# Altium PCB Zenith Solar Panel.PcbDoc (part 2 of 2)
Units mm, origin at the board's own origin, x right, y up, seen from the top; angles counter-clockwise.
Board outline 327.5 x 87 mm, 2 copper layers (Top Layer, Bottom Layer), stack 1.58 mm thick; 58 components, 37 nets, 208 pads, 1477 vias.
Unrouted connection lines stored in the file: 41.
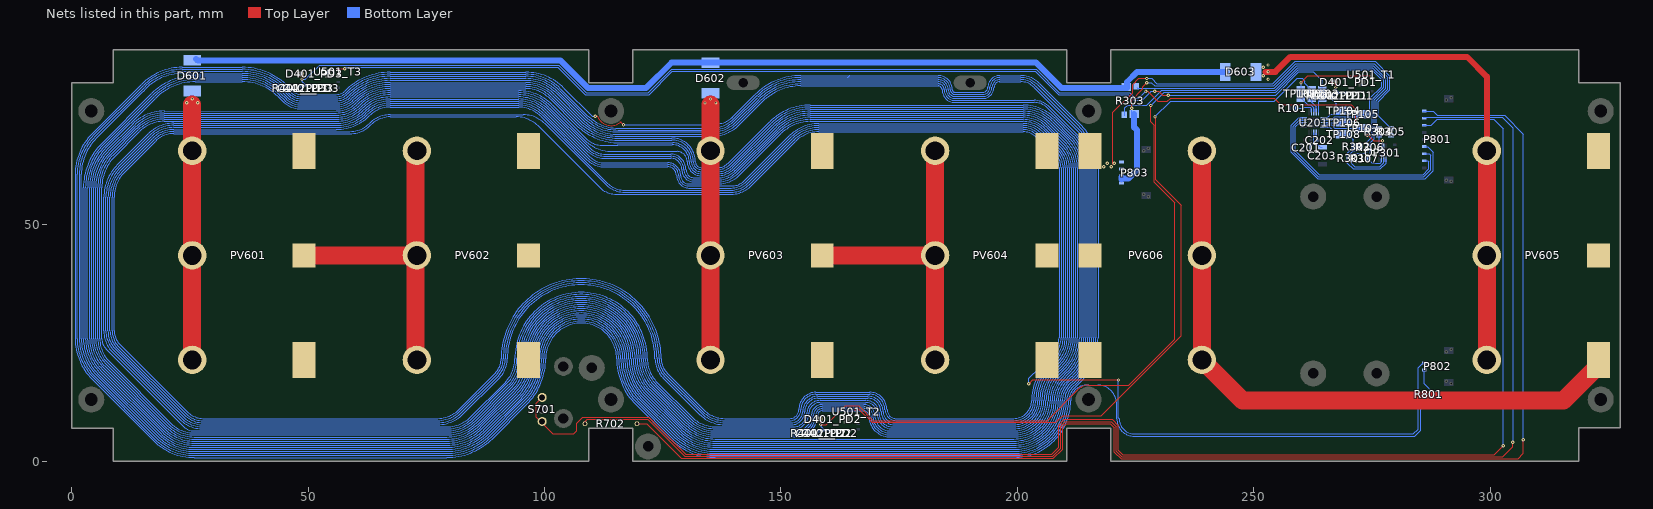
[diagram p2: the nets of this part, all layers, seen from the top]

## Via types
v1: diameter 0.711, hole 0.3, Top Layer to Bottom Layer, tented both sides, 858 vias
v2: diameter 0.8, hole 0.5, Top Layer to Bottom Layer, 617 vias
v3: diameter 0.711, hole 0.3, Top Layer to Bottom Layer, 2 vias

## Nets (pads, with @x,y where several pads share a name; then routed paths per layer and width w, separated by ;. In a path a pad name is that pad's centre, name@x,y a point inside that pad or via, vN(x,y) a via of type N, cw(c..) or ccw(c..) an arc to the next point about the centre after c; other vN are vias at no path point) (continued)
MAG1: P802.1 R801.2 | length 11601.4
  Top Layer w0.254: v1(110.7,72.908) 111.026,72.908 cw(c111.028,72.654) 111.26,72.757 ccw(c114.05,74) 115.92,71.584 cw(c116.075,71.384) 116.256,71.563 v1(116.7,71.118) ; v3(202.4,16.343) 202.46,16.343 203.262,17.145 v3(221.374,17.145)
  Bottom Layer w0.254: 0.75,25.898 0.75,60.602 ; 0.753,25.898 ccw(c12.833,25.898) 4.292,17.357 17.357,4.292 ccw(c25.898,12.833) 25.898,0.753 ; 0.753,60.602 cw(c12.917,60.602) 4.316,69.202 14.801,79.687 cw(c23.398,71.089) 23.398,83.248 ; 1.615,60.613 1.615,60.602 1.615,25.91 ccw(c12.957,25.91) 4.937,17.89 17.905,4.921 ccw(c25.898,12.914) 25.898,1.61 79.352,1.61 ccw(c79.352,14.395) 88.392,5.355 ; 1.618,60.602 cw(c12.913,60.602) 4.926,68.588 15.412,79.074 cw(c23.398,71.087) 23.398,82.382 36.102,82.382 cw(c36.102,69.605) 45.136,78.64 ; 2.048,60.61 2.048,60.602 2.048,25.907 ccw(c12.939,25.907) 5.238,18.206 18.213,5.231 ccw(c25.899,12.917) 25.899,2.047 79.352,2.047 ccw(c79.352,14.398) 88.085,5.665 ; 2.052,60.602 cw(c12.906,60.602) 5.231,68.276 14.895,77.941 14.895,77.942 15.308,78.355 15.309,78.355 15.717,78.763 cw(c23.4,71.08) 23.4,81.945 36.102,81.945 cw(c36.102,69.602) 44.829,78.33 ; 2.92,57.843 2.92,25.898 ccw(c12.941,25.898) 5.855,18.813 18.826,5.841 ccw(c25.898,12.914) 25.898,2.912 79.352,2.912 ccw(c79.352,14.395) 87.471,6.275 ; 2.923,57.843 cw(c15.646,57.843) 6.649,66.84 ; 3.788,57.843 3.788,25.899 ccw(c12.935,25.899) 6.467,19.43 19.445,6.453 ccw(c25.898,12.907) 25.898,3.78 79.352,3.78 ccw(c79.352,14.395) 86.857,6.889 ; 3.791,57.843 cw(c15.646,57.843) 7.263,66.226 17.774,76.737 cw(c26.157,68.354) 26.157,80.209 36.102,80.209 cw(c36.102,69.602) 43.575,77.129 ; 4.222,57.84 4.222,25.895 ccw(c12.927,25.895) 6.772,19.74 19.751,6.76 ccw(c25.898,12.907) 25.898,4.214 ; 4.225,57.843 cw(c15.646,57.843) 7.57,65.919 12.885,71.233 12.951,71.299 ; 4.656,57.84 4.656,25.895 ccw(c12.927,25.895) 7.079,20.047 20.058,7.067 ccw(c25.898,12.907) 25.898,4.648 ; 4.662,57.846 cw(c15.649,57.846) 7.88,65.615 13.191,70.927 ; 5.09,57.843 5.09,25.899 ccw(c12.941,25.899) 7.39,20.347 20.361,7.376 ccw(c25.898,12.913) 25.898,5.082 79.35,5.082 ; 5.093,57.843 cw(c15.646,57.843) 8.184,65.305 13.498,70.62 ; 5.524,57.84 5.524,25.895 ccw(c12.933,25.895) 7.694,20.656 20.668,7.682 ccw(c25.898,12.913) 25.898,5.516 79.35,5.516 ; 5.53,57.866 cw(c15.649,57.866) 8.494,65.022 13.795,70.323 ; 5.961,57.843 cw(c15.646,57.843) 8.798,64.691 14.112,70.006 ; 5.966,57.843 5.966,25.899 ccw(c12.969,25.899) 8.017,20.947 20.98,7.984 ccw(c25.898,12.902) 25.898,5.947 ; 6.392,57.843 6.392,25.898 ccw(c9.515,25.898) 7.307,23.69 23.704,7.293 ccw(c25.898,9.487) 25.898,6.384 ; 6.395,57.843 cw(c15.646,57.843) 9.105,64.384 14.419,69.699 ; 6.652,66.837 17.16,77.345 cw(c26.157,68.349) 26.157,81.072 36.102,81.072 cw(c36.102,69.597) 44.216,77.711 45.256,76.671 ccw(c48.5,79.915) 48.5,75.327 56,75.327 ccw(c56,79.915) 59.244,76.671 ; 6.81,27.512 ccw(c13.222,27.514) 8.567,23.104 22.83,8.842 ccw(c27.716,13.728) 27.489,6.821 79.351,6.818 ; 6.81,27.514 6.81,55.75 cw(c16.561,55.75) 9.666,62.645 16.237,69.217 cw(c21.577,63.877) 21.577,71.429 ; 7.244,27.512 ccw(c13.222,27.514) 8.882,23.403 23.136,9.148 ccw(c27.716,13.728) 27.503,7.255 79.352,7.252 ccw(c79.352,14.395) 84.402,9.344 ; 7.244,27.514 7.244,55.75 cw(c16.561,55.75) 9.973,62.338 16.529,68.894 cw(c21.562,63.861) 21.562,70.979 56,70.979 56.006,70.979 ; 7.678,27.515 7.678,55.75 cw(c16.561,55.75) 10.28,62.031 16.836,68.588 cw(c21.562,63.861) 21.562,70.545 56,70.545 56.006,70.545 ; 7.678,27.513 ccw(c13.075,27.514) 9.157,23.803 23.55,9.409 ccw(c27.711,13.569) 27.517,7.689 77.376,7.686 ; 8.112,27.513 ccw(c13.074,27.514) 9.471,24.101 23.821,9.751 ccw(c27.764,13.694) 27.764,8.119 64.911,8.116 77.376,8.116 ; 8.112,27.515 8.112,55.75 cw(c16.561,55.75) 10.586,61.724 17.143,68.281 cw(c21.562,63.861) 21.562,70.111 55.994,70.111 56.006,70.111 ; 8.546,27.513 ccw(c13.074,27.514) 9.786,24.4 24.128,10.058 ccw(c27.764,13.694) 27.764,8.553 ; 8.546,27.515 8.546,55.75 cw(c16.561,55.75) 10.893,61.417 17.45,67.974 cw(c21.562,63.861) 21.562,69.677 58.854,69.677 ; 8.98,27.513 ccw(c12.727,27.514) 10.006,24.937 24.68,10.264 ccw(c27.764,13.348) 27.764,8.987 ; 8.98,27.515 8.98,55.75 cw(c16.561,55.75) 11.2,61.111 17.756,67.667 cw(c21.562,63.861) 21.562,69.243 58.854,69.243 ; 12.882,71.237 cw(c19.613,64.506) 19.613,74.025 ; 13.188,70.93 cw(c19.613,64.506) 19.613,73.591 ; 13.495,70.623 cw(c19.613,64.506) 19.613,73.157 56,73.157 ccw(c56,79.915) 60.78,75.138 ; 13.802,70.316 cw(c19.613,64.506) 19.613,72.723 56,72.723 ccw(c56,79.915) 61.087,74.831 ; 14.109,70.009 cw(c19.613,64.506) 19.613,72.289 56,72.289 ccw(c56,79.915) 61.394,74.524 cw(c67.359,68.558) 67.359,76.995 94.5,76.995 ; 14.416,69.702 cw(c19.613,64.506) 19.613,71.855 56,71.855 ; 19.613,73.591 56,73.591 ccw(c56,79.915) 60.473,75.445 ; 19.613,74.02 56,74.025 ccw(c56,79.915) 60.166,75.751 ; 21.591,71.418 56,71.421 ccw(c56,79.915) 62.008,73.911 ; 23.398,83.25 36.102,83.25 ; 25.898,0.75 79.352,0.75 ; 25.898,5.953 79.352,5.95 ccw(c79.352,14.395) 85.323,8.423 ; 25.898,6.387 79.352,6.384 ccw(c79.352,14.395) 85.016,8.73 ; 25.899,4.214 79.352,4.214 ccw(c79.352,14.395) 86.551,7.196 ; 25.899,4.648 79.352,4.648 ccw(c79.352,14.395) 86.244,7.503 ; 27.764,8.561 77.376,8.558 ccw(c77.376,15.267) 81.905,10.318 89.868,18.281 ccw(c86.498,21.652) 91.265,21.652 cw(c107.745,21.652) 124.225,21.652 ccw(c128.992,21.652) 125.621,18.281 ; 27.764,8.995 77.376,8.992 ccw(c77.376,15.267) 81.605,10.632 89.561,18.588 ccw(c86.498,21.652) 90.831,21.652 cw(c107.745,21.652) 124.659,21.652 ccw(c128.992,21.652) 125.928,18.588 ; 36.102,83.248 cw(c36.102,69.603) 45.75,79.252 ; 43.602,77.097 44.642,76.057 ccw(c48.5,79.915) 48.5,74.459 56,74.459 ccw(c56,79.915) 59.859,76.058 ; 44.829,78.325 45.87,77.285 ccw(c48.5,79.915) 48.5,76.195 56,76.195 ccw(c56,79.915) 58.63,77.285 ; 45.136,78.635 46.176,77.594 ccw(c48.5,79.918) 48.5,76.632 56,76.632 ccw(c56,79.918) 58.324,77.594 cw(c67.358,68.56) 67.358,81.337 96.061,81.337 ; 45.563,76.978 ccw(c48.5,79.915) 48.5,75.761 56,75.761 ccw(c56,79.915) 58.938,76.977 ; 45.563,76.983 44.522,78.023 ccw(c36.102,69.602) 36.102,81.511 26.157,81.511 ccw(c26.157,68.354) 16.854,77.657 6.343,67.146 ccw(c15.646,57.843) 2.489,57.843 2.489,25.898 ccw(c12.951,25.898) 5.553,18.5 18.519,5.535 ccw(c25.898,12.914) 25.898,2.478 79.351,2.478 ccw(c79.351,14.395) 87.778,5.968 ; 45.749,79.251 46.791,78.209 ; 46.79,78.208 ccw(c48.5,79.918) 48.5,77.5 56,77.5 ccw(c56,79.919) 57.71,78.209 cw(c67.358,68.561) 67.358,82.206 96.061,82.206 cw(c96.061,70.829) 104.105,78.875 110.072,72.908 v1(110.7,72.908) ; 55.994,70.127 ccw(c55.994,79.923) 62.923,72.998 ; 56,70.553 ccw(c56,79.915) 62.622,73.297 cw(c67.36,68.558) 67.36,75.259 ; 56,70.987 ccw(c56,79.915) 62.315,73.604 cw(c67.359,68.558) 67.359,75.693 ; 56,71.855 ccw(c56,79.915) 61.701,74.217 ; 56,77.066 48.5,77.066 cw(c48.5,79.918) 46.483,77.901 45.443,78.942 45.443,78.947 ccw(c36.102,69.605) 36.102,82.816 23.4,82.816 ccw(c23.4,71.083) 15.104,79.38 4.619,68.895 ccw(c12.913,60.602) 1.184,60.602 1.184,25.898 ccw(c12.934,25.898) 4.625,17.59 17.598,4.617 ccw(c25.898,12.917) 25.898,1.179 79.351,1.179 ccw(c79.351,14.398) 88.698,5.051 88.703,5.059 95.951,12.307 ccw(c86.609,21.648) 99.82,21.586 99.82,21.648 99.812,21.648 cw(c107.748,21.648) 115.684,21.648 ccw(c128.895,21.648) 119.557,12.303 126.807,5.053 ccw(c136.148,14.395) 136.124,1.184 136.148,1.184 ; 56,77.067 ccw(c56,79.919) 58.019,77.905 cw(c67.358,68.561) 67.358,81.772 96.063,81.772 cw(c96.062,71.406) 103.368,78.759 108.97,73.157 ccw(c115.626,79.813) 115.626,70.4 135.269,70.4 ccw(c135.269,77.039) 139.964,72.345 144.81,77.19 144.811,77.192 ; 58.63,77.293 cw(c67.358,68.565) 67.358,80.908 96.056,80.908 ; 58.854,69.241 ccw(c58.854,75.48) 63.267,71.069 ; 58.854,69.675 ccw(c58.854,75.48) 62.96,71.376 cw(c67.391,66.944) 67.391,73.211 95.501,73.211 cw(c95.501,66.566) 100.177,71.287 ; 58.937,76.987 cw(c67.358,68.566) 67.358,80.475 96.061,80.475 96.101,80.475 ; 59.244,76.675 cw(c67.358,68.561) 67.358,80.036 96.072,80.036 cw(c96.064,71.508) 102.094,77.538 107.675,71.957 ccw(c115.539,79.821) 115.539,68.7 133.926,68.7 cw(c135.1,65.611) 136.114,68.756 ccw(c136.192,68.998) 136.217,68.745 ccw(c135.354,76.956) 141.192,71.118 146.022,75.949 146.034,75.966 146.05,75.982 cw(c154.148,67.852) 154.148,79.327 154.148,79.33 183.25,79.33 cw(c183.25,78.5) 184.08,78.5 ccw(c186.75,78.5) 186.75,75.83 203.547,75.83 203.547,75.827 cw(c203.546,71.743) 206.434,74.631 211.943,69.122 cw(c204.875,62.055) 214.87,62.055 214.873,26.052 cw(c203.398,26.052) 211.546,17.971 211.512,17.938 211.505,17.938 210.283,16.717 210.279,16.713 210.287,16.713 ccw(c214.25,12.75) 208.646,12.748 cw(c199.25,12.75) 199.25,3.354 136.148,3.354 cw(c136.148,14.395) 128.341,6.588 121.088,13.841 cw(c128.895,21.648) 117.854,21.648 117.851,21.648 ccw(c107.745,21.648) 97.639,21.731 97.639,21.648 97.653,21.648 97.653,21.567 cw(c97.399,21.566) 97.653,21.563 cw(c86.612,21.648) 94.419,13.841 87.172,6.594 87.164,6.582 87.146,6.564 cw(c79.352,14.395) 79.352,3.346 25.898,3.346 cw(c25.898,12.906) 19.138,6.146 6.16,19.124 cw(c12.934,25.899) 3.354,25.899 3.354,57.843 3.357,57.843 cw(c15.646,57.843) 6.956,66.533 17.467,77.044 cw(c26.157,68.354) 26.154,80.643 36.102,80.643 cw(c36.102,69.602) 43.881,77.437 43.909,77.404 44.949,76.364 ccw(c48.5,79.915) 48.5,74.893 56,74.893 ccw(c56,79.915) 59.552,76.365 cw(c67.359,68.558) 67.359,79.599 96.103,79.599 96.067,79.601 96.138,79.601 cw(c96.139,79.347) 96.143,79.601 cw(c96.061,71.501) 101.789,77.229 107.376,71.643 ccw(c115.446,79.713) 115.446,68.3 126.933,68.3 cw(c126.933,63.333) 127.938,68.197 cw(c126.933,63.333) 131.9,63.333 ccw(c133.16,63.333) 133.16,62.073 136.607,62.072 ccw(c136.607,65.256) 138.859,63.005 147.625,71.732 cw(c156.181,63.176) 156.181,75.276 159.477,75.276 201.196,75.276 cw(c201.196,65.667) 207.99,72.461 211.636,68.816 cw(c204.875,62.055) 214.436,62.055 ; 59.858,76.061 cw(c67.358,68.561) 67.358,79.168 96.072,79.168 cw(c96.064,71.52) 101.472,76.928 107.053,71.347 ccw(c115.46,79.754) 115.46,67.865 126.937,67.865 cw(c126.937,63.336) 131.466,63.336 ccw(c133.16,63.336) 133.16,61.642 ; 60.164,75.757 cw(c67.357,68.564) 67.357,78.737 96.061,78.737 ; 60.472,75.447 cw(c67.358,68.561) 67.358,78.3 94.5,78.3 cw(c94.5,68.195) 101.611,75.374 108.808,68.178 ; 60.783,75.137 cw(c67.362,68.557) 67.358,77.862 94.5,77.862 ; 61.086,74.83 cw(c67.358,68.556) 67.358,77.427 94.5,77.427 ; 61.7,74.217 cw(c67.358,68.557) 67.358,76.56 94.5,76.56 ; 62.007,73.91 cw(c67.358,68.557) 67.358,76.126 94.5,76.126 ; 62.928,72.989 cw(c67.358,68.557) 67.358,74.824 ; 63.267,71.069 cw(c67.391,66.944) 67.391,72.777 94,72.777 cw(c94,66.132) 98.676,70.853 ; 67.358,74.823 94.499,74.823 ; 67.36,75.258 94.5,75.258 ; 67.359,75.692 94.5,75.692 ; 77.376,7.69 ccw(c77.376,15.267) 82.505,9.691 90.482,17.667 ccw(c86.498,21.652) 92.133,21.652 cw(c107.745,21.652) 123.357,21.652 ; 77.376,8.124 ccw(c77.376,15.267) 82.205,10.004 90.175,17.974 ccw(c86.498,21.652) 91.699,21.652 cw(c107.745,21.652) 123.791,21.652 ccw(c128.992,21.652) 125.314,17.974 ; 79.351,6.806 ccw(c79.351,14.383) 84.709,9.025 ; 79.352,0.753 ccw(c79.352,14.407) 89.006,4.752 96.253,12 ccw(c86.605,21.648) 100.25,21.648 cw(c107.752,21.648) 115.253,21.648 ccw(c128.898,21.648) 119.25,12 126.5,4.75 ccw(c136.148,14.398) 136.148,0.753 ; 79.352,5.082 ccw(c79.352,14.395) 85.937,7.81 ; 79.352,5.516 ccw(c79.352,14.395) 85.63,8.117 ; 84.403,9.356 91.65,16.603 ccw(c86.605,21.648) 93.74,21.648 ; 84.71,9.049 91.957,16.296 ccw(c86.605,21.648) 94.174,21.648 ; 85.024,8.741 92.272,15.988 ccw(c86.613,21.647) 94.616,21.647 ; 85.323,8.435 92.571,15.683 ccw(c86.605,21.648) 95.042,21.648 ; 85.63,8.128 92.878,15.376 ccw(c86.605,21.648) 95.476,21.648 ; 85.937,7.821 93.185,15.069 ccw(c86.605,21.648) 95.91,21.648 ; 86.244,7.514 93.492,14.762 ccw(c86.605,21.648) 96.344,21.648 ; 86.551,7.207 93.798,14.455 ccw(c86.605,21.648) 96.778,21.648 ; 86.865,6.901 94.112,14.148 ccw(c86.612,21.648) 97.219,21.648 ; 87.472,6.287 94.719,13.534 ccw(c86.605,21.648) 98.08,21.648 ; 87.778,5.98 95.026,13.228 ccw(c86.605,21.648) 98.514,21.648 ; 88.085,5.673 95.333,12.921 ccw(c86.605,21.648) 98.948,21.648 ; 88.392,5.366 95.64,12.614 ccw(c86.605,21.648) 99.382,21.648 ; 93.733,21.652 cw(c107.745,21.652) 121.757,21.652 ; 94.167,21.652 cw(c107.745,21.652) 121.204,23.442 cw(c107.745,21.652) 121.323,21.652 ccw(c128.892,21.652) 123.539,16.3 ; 94.5,74.828 cw(c94.5,68.195) 99.168,72.908 113.278,58.797 ccw(c116.912,62.43) 116.912,57.291 ; 94.5,75.262 cw(c94.5,68.195) 99.473,73.216 108.98,63.709 ccw(c112.613,67.343) 112.613,62.204 126.066,62.204 cw(c126.066,60.356) 127.914,60.356 ccw(c130.538,60.356) 130.538,57.732 ; 94.5,75.696 cw(c94.5,68.195) 99.779,73.524 109.286,64.016 ccw(c112.613,67.343) 112.613,62.638 126.066,62.638 cw(c126.066,60.356) 128.348,60.356 ccw(c130.538,60.356) 130.538,58.166 139.494,58.166 ; 94.5,76.134 cw(c94.5,68.199) 100.084,73.837 ; 94.5,76.564 cw(c94.5,68.195) 100.39,74.141 108.827,65.703 ; 94.5,76.998 cw(c94.5,68.195) 100.692,74.452 cw(c94.5,68.195) 100.694,74.45 109.134,66.01 ; 94.5,77.432 cw(c94.5,68.195) 100.999,74.759 109.441,66.317 ; 94.5,77.866 cw(c94.5,68.195) 101.306,75.066 108.507,67.865 ; 94.601,21.65 cw(c107.745,21.65) 120.889,21.65 ccw(c128.892,21.65) 123.233,15.991 ; 95.035,21.648 cw(c107.745,21.648) 120.455,21.648 ; 95.469,21.648 cw(c107.745,21.648) 120.021,21.648 ; 95.906,21.648 cw(c107.748,21.648) 119.59,21.648 ; 96.061,78.734 cw(c96.061,71.501) 101.176,76.615 106.754,71.037 ccw(c115.776,80.058) 115.776,67.3 127.068,67.3 cw(c127.068,63.336) 131.032,63.336 ccw(c133.16,63.336) 133.16,61.208 ; 96.061,80.47 cw(c96.061,71.458) 102.433,77.83 108.012,72.252 ccw(c115.621,79.861) 115.621,69.1 135.272,69.1 ccw(c135.272,77.038) 140.885,71.425 145.716,76.256 cw(c154.136,67.835) 154.136,79.744 ; 96.061,80.904 cw(c96.061,71.404) 102.778,78.122 108.357,72.543 ccw(c115.462,79.647) 115.462,69.6 135.432,69.6 ccw(c135.432,76.878) 140.578,71.732 145.405,76.559 ; 96.061,81.338 cw(c96.061,71.398) 103.09,78.426 108.669,72.848 ccw(c115.544,79.723) 115.544,70 135.35,70 ccw(c135.35,76.959) 140.271,72.038 145.106,76.873 ; 96.34,21.648 cw(c107.748,21.648) 119.156,21.648 ; 96.774,21.648 cw(c107.748,21.648) 118.722,21.648 ccw(c128.895,21.648) 121.702,14.455 ; 97.205,21.648 cw(c107.745,21.648) 118.285,21.648 ; 98.073,21.648 cw(c107.745,21.648) 117.417,21.648 ; 98.507,21.648 cw(c107.745,21.648) 116.983,21.648 ; 98.672,70.866 98.681,70.858 111.76,57.778 ; 98.944,21.648 cw(c107.748,21.648) 116.552,21.648 ; 99.378,21.648 cw(c107.748,21.648) 116.118,21.648 ccw(c128.895,21.648) 119.86,12.614 ; 100.084,73.833 109.593,64.323 ccw(c112.613,67.343) 112.613,63.072 126.066,63.072 cw(c126.066,60.356) 128.782,60.356 ccw(c130.538,60.356) 130.538,58.6 136.607,58.6 ccw(c136.607,65.256) 141.292,60.529 150.08,69.277 ; 100.173,71.3 100.182,71.292 113.2,58.273 ccw(c116.912,62.43) 116.912,56.857 ; 108.509,67.867 ccw(c114.314,73.672) 114.314,65.462 128.035,65.462 cw(c128.035,63.333) 130.164,63.333 ccw(c133.16,63.333) 133.138,60.337 ; 108.803,68.173 ccw(c112.119,71.488) 112.119,66.8 115.444,66.8 115.516,66.871 127.048,66.871 ; 108.829,65.705 ccw(c112.897,69.773) 112.897,64.02 126.672,64.02 cw(c126.672,61.658) 129.034,61.658 ccw(c131.658,61.658) 131.658,59.034 ; 109.136,66.012 ccw(c112.897,69.773) 112.897,64.454 126.672,64.454 cw(c126.672,61.658) 129.468,61.658 ccw(c131.658,61.658) 131.658,59.468 136.607,59.468 ccw(c136.607,65.256) 140.682,61.146 140.699,61.163 149.466,69.89 cw(c156.181,63.176) 155.655,72.657 cw(c156.181,63.176) 155.7,72.659 cw(c156.181,63.176) 156.181,72.672 201.196,72.672 cw(c201.196,65.645) 206.164,70.614 209.788,66.99 cw(c204.852,62.055) 211.832,62.055 211.835,26.052 cw(c203.398,26.052) 209.364,20.086 ; 109.443,66.319 ccw(c112.897,69.773) 112.897,64.888 126.672,64.888 cw(c126.672,61.658) 129.902,61.658 ccw(c131.658,61.658) 131.658,59.902 136.607,59.902 ccw(c136.607,65.256) 140.376,61.454 140.393,61.47 149.159,70.197 cw(c156.181,63.176) 156.104,73.105 cw(c156.181,63.176) 156.146,73.106 cw(c156.181,63.176) 156.181,73.106 ; 111.76,57.77 ccw(c115.227,61.563) 115.227,56.424 139.494,56.437 ; 116.555,21.648 ccw(c128.898,21.648) 120.17,12.921 ; v1(116.7,71.118) 136.278,71.118 136.5,71.34 ccw(c136.5,75.805) 139.614,72.605 ccw(c139.437,72.787) 139.616,72.607 139.657,72.648 139.652,72.652 144.5,77.5 cw(c154.148,67.852) 154.148,81.497 164.495,81.497 ; 116.912,56.854 139.494,56.866 ccw(c139.494,62.22) 143.28,58.434 ; 116.912,57.288 139.494,57.3 ccw(c139.494,62.22) 142.973,58.741 ; 116.986,21.648 ccw(c128.895,21.648) 120.474,13.228 ; 117.42,21.648 ccw(c128.895,21.648) 120.781,13.534 ; 118.288,21.648 ccw(c128.895,21.648) 121.395,14.148 ; 119.149,21.655 ccw(c128.888,21.655) 122.002,14.768 ; 119.593,21.645 ccw(c128.898,21.645) 122.319,15.065 ; 119.864,12.61 127.114,5.36 ccw(c136.148,14.395) 136.148,1.618 199.25,1.618 ccw(c199.25,12.75) 210.382,12.75 cw(c214.25,12.75) 211.515,15.485 212.74,16.71 ccw(c203.398,26.052) 216.609,26.052 216.606,62.055 ccw(c204.148,62.055) 212.957,70.864 204.188,79.634 ccw(c200.71,76.156) 200.71,81.074 196.25,81.074 ; 120.027,21.647 ccw(c128.898,21.647) 122.626,15.374 129.876,8.124 ccw(c136.148,14.397) 136.13,5.526 153.234,5.526 ccw(c153.234,9.572) 157.28,9.572 cw(c158.78,9.572) 158.757,11.072 ; 120.171,12.92 127.421,5.67 ccw(c136.148,14.398) 136.148,2.055 ; 120.455,21.65 ccw(c128.892,21.65) 122.926,15.684 ; 120.478,13.224 127.728,5.974 ccw(c136.148,14.395) 136.148,2.486 199.25,2.486 ccw(c199.25,12.75) 209.514,12.75 ; 120.784,13.531 128.034,6.281 ccw(c136.148,14.395) 136.148,2.92 199.25,2.92 ccw(c199.25,12.75) 209.08,12.75 ; 121.398,14.145 128.648,6.895 ccw(c136.148,14.395) 136.126,3.788 ; 121.705,14.452 128.955,7.202 ccw(c136.148,14.395) 136.127,4.222 ; 121.76,21.648 ccw(c128.895,21.648) 123.85,16.603 ; 122.012,14.758 129.262,7.508 ccw(c136.148,14.395) 136.128,4.656 ; 122.319,15.066 129.569,7.816 ccw(c136.148,14.396) 136.129,5.091 ; 122.933,15.679 130.183,8.429 ccw(c136.148,14.395) 136.131,5.958 ; 123.239,15.986 130.489,8.736 ccw(c136.148,14.395) 136.132,6.392 ; 123.353,21.655 ccw(c128.988,21.655) 125.004,17.671 ; 123.546,16.293 130.796,9.044 ccw(c136.148,14.396) 136.133,6.827 136.148,6.827 140.373,6.827 ; 123.853,16.6 131.103,9.35 ccw(c136.148,14.395) 135.926,7.263 ccw(c136.148,14.395) 136.148,7.26 148.521,7.261 ; 125.01,17.664 132.766,9.909 ; 125.315,17.976 133.197,10.094 133.201,10.091 ; 125.613,18.289 125.621,18.281 133.497,10.404 ; 125.926,18.586 133.685,10.828 ; 127.048,66.883 cw(c127.048,63.333) 130.598,63.333 ccw(c133.16,63.333) 133.16,60.771 136.607,60.77 ccw(c136.607,65.256) 139.765,62.07 ccw(c136.607,65.256) 139.779,62.084 148.546,70.811 cw(c156.181,63.176) 156.181,73.974 201.196,73.974 cw(c201.196,65.669) 207.068,71.541 210.715,67.894 cw(c204.877,62.055) 213.134,62.055 213.137,26.052 cw(c203.398,26.052) 210.285,19.165 ; 130.538,57.734 139.494,57.734 ccw(c139.494,62.22) 142.666,59.048 ; 131.658,59.034 136.607,59.034 ccw(c136.607,65.256) 140.987,60.837 141.007,60.857 149.773,69.584 cw(c156.181,63.176) 155.181,72.182 cw(c156.181,63.176) 155.228,72.187 cw(c156.181,63.176) 156.181,72.238 201.196,72.238 cw(c201.196,65.669) 205.84,70.314 209.488,66.666 cw(c204.877,62.055) 211.398,62.055 211.401,26.052 cw(c203.398,26.052) 209.057,20.393 ; 132.764,9.907 ccw(c138.116,15.259) 132.9,9.775 ccw(c138.116,15.259) 138.1,7.69 ; 133.16,61.204 136.607,61.204 ccw(c136.607,65.256) 139.459,62.378 139.472,62.391 148.239,71.118 ; 133.16,61.638 136.605,61.638 ; 133.199,10.095 ccw(c138.116,15.265) 138.101,8.13 152.277,8.131 ccw(c152.277,10.441) 154.587,10.441 ; 133.498,10.405 ccw(c138.116,15.26) 138.102,8.559 ; 133.685,10.826 ccw(c138.116,15.258) 138.116,8.991 151.889,8.992 ccw(c151.889,10.868) 153.765,10.868 cw(c157.435,10.868) 157.38,14.537 ; 136.127,5.961 136.131,5.961 153.234,5.962 153.247,5.962 ; 136.129,5.092 153.234,5.092 ccw(c153.234,9.572) 157.714,9.572 cw(c158.78,9.572) 158.764,10.638 ; 136.132,6.393 153.234,6.394 ccw(c153.234,9.572) 156.412,9.572 cw(c158.78,9.572) 158.744,11.94 ; 136.148,0.75 199.25,0.75 ccw(c199.25,12.75) 211.25,12.75 cw(c214.5,12.75) 214.452,16 cw(c215.049,13.004) 215.049,16.059 216.941,16.059 cw(c216.941,12) 221,12 221,8.998 ccw(c224.75,8.998) 224.75,5.248 281,5.248 284,5.248 285.25,6.498 285.25,11 286,11.75 R801.2@286,13.5 ; 136.148,1.185 199.421,1.185 ; 136.148,2.052 199.25,2.052 ccw(c199.25,12.75) 209.948,12.75 cw(c214.25,12.75) 211.208,15.792 212.433,17.017 ccw(c203.398,26.052) 216.175,26.052 216.172,62.055 ccw(c204.292,62.055) 212.692,70.455 203.779,79.369 ccw(c200.71,76.301) 200.71,80.64 196.25,80.64 196.215,80.64 ; 136.148,3.788 199.25,3.788 ccw(c199.25,12.75) 208.212,12.747 cw(c214.25,12.75) 209.98,17.02 ; 136.148,4.222 199.25,4.222 ccw(c199.25,12.75) 207.778,12.747 cw(c214.25,12.75) 209.674,17.326 ; 136.148,4.656 199.25,4.656 ccw(c199.25,12.75) 207.344,12.747 cw(c214.25,12.75) 209.367,17.633 ; 136.607,61.638 ccw(c136.607,65.256) 139.154,62.686 139.165,62.698 147.932,71.425 cw(c156.181,63.176) 156.181,74.842 201.196,74.842 ; 138.1,7.696 152.272,7.697 ; 138.102,8.557 151.889,8.558 ccw(c151.889,10.868) 154.199,10.868 ; 139.494,56.432 ccw(c139.494,62.22) 143.587,58.127 ; 139.494,58.168 ccw(c139.494,62.22) 142.346,59.342 ; 140.373,6.825 152.719,6.826 ccw(c152.719,10.004) 155.897,10.004 cw(c158.265,10.004) 158.23,12.372 ; 142.356,59.359 151.892,68.852 cw(c157.991,62.748) 157.991,71.376 ; 142.67,59.044 152.206,68.537 cw(c158,62.743) 158,70.937 ; 142.977,58.737 152.513,68.23 cw(c158,62.743) 158,70.503 201.196,70.503 cw(c201.196,65.671) 204.613,69.088 208.259,65.441 cw(c204.873,62.055) 209.662,62.055 209.665,26.052 cw(c203.398,26.052) 207.83,21.62 206.604,20.395 ccw(c214.25,12.75) 203.438,12.745 ; 143.287,58.427 152.823,67.92 152.863,67.959 ; 143.591,58.124 153.127,67.617 cw(c158,62.743) 158,69.635 ; 144.807,77.193 cw(c154.148,67.852) 154.148,81.063 164.061,81.063 ; 145.114,76.89 cw(c154.148,67.855) 154.148,80.632 163.672,80.632 183.25,80.632 cw(c183.25,78.5) 185.382,78.5 ccw(c186.75,78.5) 186.75,77.132 ; 145.421,76.58 cw(c154.148,67.852) 154.148,80.195 163.235,80.195 183.25,80.195 ; 148.239,71.118 cw(c156.181,63.176) 156.181,74.408 201.196,74.408 cw(c201.196,65.669) 207.375,71.848 211.022,68.201 cw(c204.877,62.055) 213.568,62.055 ; 148.521,7.264 152.719,7.264 ccw(c152.719,10.008) 155.463,10.008 cw(c158.265,10.008) 158.265,12.81 ; 150.08,69.277 cw(c156.181,63.176) 154.668,71.67 cw(c156.181,63.176) 154.719,71.679 cw(c156.181,63.176) 156.181,71.804 201.196,71.804 cw(c201.196,65.669) 205.533,70.007 209.181,66.359 cw(c204.877,62.055) 210.964,62.055 210.967,26.052 cw(c203.398,26.052) 208.75,20.699 207.525,19.474 ccw(c214.25,12.75) 204.74,12.746 cw(c199.25,12.75) 199.25,7.26 173.5,7.259 173.379,7.259 ; 152.272,7.701 ccw(c152.272,10.445) 155.016,10.445 cw(c157.818,10.445) 157.818,13.247 ; 152.82,67.924 cw(c158,62.743) 158,70.069 201.196,70.069 cw(c201.196,65.674) 204.303,68.782 207.954,65.132 cw(c204.877,62.055) 209.228,62.055 209.231,26.052 cw(c203.398,26.052) 207.523,21.927 206.298,20.702 ccw(c214.25,12.75) 203.004,12.745 ; 153.234,5.96 ccw(c153.234,9.572) 156.846,9.572 cw(c158.78,9.572) 158.751,11.506 ; 154.148,79.761 162.801,79.761 183.25,79.761 ; 154.199,10.87 cw(c157.435,10.87) 157.387,14.106 ; 154.588,10.445 cw(c157.824,10.445) 157.776,13.681 ; 156.181,73.106 201.196,73.106 cw(c201.196,65.669) 206.454,70.928 210.102,67.28 cw(c204.877,62.055) 212.266,62.055 212.269,26.052 cw(c203.398,26.052) 209.671,19.779 ; 157.38,14.546 168.75,14.542 cw(c168.75,10.872) 172.42,10.872 ccw(c174.296,10.873) 174.296,8.997 ; 157.387,14.108 168.75,14.108 cw(c168.75,10.872) 171.986,10.872 ccw(c174.296,10.872) 174.296,8.562 199.25,8.562 ccw(c199.25,12.75) 203.438,12.747 ; 157.776,13.678 168.358,13.678 ; 157.818,13.244 168.358,13.244 cw(c168.358,10.442) 171.16,10.442 ccw(c173.904,10.442) 173.904,7.698 ; 157.991,70.936 158,70.936 201.196,70.936 cw(c201.196,65.666) 204.922,69.392 208.566,65.748 cw(c204.873,62.055) 210.096,62.055 210.099,26.052 cw(c203.398,26.052) 208.137,21.313 206.911,20.088 ccw(c214.25,12.75) 203.872,12.746 cw(c199.25,12.75) 199.25,8.128 173.904,8.128 173.796,8.128 ; 157.991,71.37 201.196,71.37 cw(c201.196,65.669) 205.226,69.7 208.874,66.052 cw(c204.877,62.055) 210.53,62.055 210.533,26.052 cw(c203.398,26.052) 208.443,21.006 207.218,19.781 ccw(c214.25,12.75) 204.306,12.746 cw(c199.25,12.75) 199.25,7.694 173.904,7.694 173.796,7.694 ; 158,69.634 201.196,69.634 cw(c201.196,65.669) 203.999,68.472 207.647,64.825 cw(c204.877,62.055) 208.794,62.055 208.797,26.052 cw(c203.35,26.052) 207.202,22.2 204.783,19.781 204.693,19.781 202.4,17.489 v3(202.4,16.343) ; 158.266,12.374 167.954,12.374 cw(c167.954,10.006) 170.322,10.006 ccw(c173.5,10.006) 173.5,6.828 ; 158.301,12.808 167.954,12.808 cw(c167.954,10.005) 170.756,10.005 ccw(c173.5,10.005) 173.5,7.261 ; 158.75,10.636 158.764,10.636 167.567,10.636 cw(c167.5,9.572) 168.566,9.572 ccw(c173.046,9.572) 173.046,5.092 ; 158.75,11.07 158.757,11.07 167.579,11.07 cw(c167.5,9.572) 169,9.572 ccw(c173.046,9.572) 173.046,5.526 ; 158.751,11.504 167.59,11.504 cw(c167.5,9.572) 169.434,9.572 ccw(c173.046,9.572) 173.046,5.96 ; 158.75,11.938 167.5,11.938 ; 167.5,11.94 cw(c167.5,9.572) 169.868,9.572 ccw(c173.046,9.572) 173.046,6.394 ; 168.358,13.679 cw(c168.358,10.443) 171.594,10.443 ccw(c173.904,10.444) 173.904,8.134 ; 173.046,5.09 199.25,5.09 ccw(c199.25,12.75) 206.91,12.747 ; 173.046,5.522 199.25,5.522 ccw(c199.25,12.748) 206.476,12.746 cw(c214.25,12.749) 208.753,18.247 ; 173.046,5.958 199.25,5.958 ccw(c199.25,12.75) 206.042,12.747 ; 173.046,6.392 199.25,6.392 ccw(c199.25,12.75) 205.608,12.748 ; 173.379,6.826 173.5,6.826 199.25,6.826 ; 174.216,8.992 174.296,8.992 199.17,8.992 ; 183.25,79.764 cw(c183.25,78.5) 184.514,78.5 ccw(c186.75,78.5) 186.75,76.264 203.547,76.264 203.567,76.264 ; 183.25,80.198 cw(c183.25,78.5) 184.948,78.5 ccw(c186.75,78.5) 186.75,76.698 192.75,76.698 ccw(c192.75,79) 195.052,79 cw(c196.25,79) 196.25,80.198 ; 183.25,81.063 164.103,81.063 164.061,81.063 ; 183.25,81.066 cw(c183.25,78.5) 185.816,78.5 ccw(c186.75,78.5) 186.75,77.566 192.75,77.566 ccw(c192.75,79) 194.184,79 cw(c196.25,79) 196.25,81.066 ; 186.25,78.488 ccw(c183.25,78.497) 186.25,78.5 ; 186.755,77.132 192.75,77.132 ccw(c192.75,79) 194.618,79 cw(c196.25,79) 196.25,80.632 ; 196.203,80.206 196.25,80.206 200.71,80.206 cw(c200.71,76.301) 203.472,79.062 212.385,70.148 cw(c204.292,62.055) 215.738,62.055 215.741,26.052 cw(c203.398,26.052) 212.126,17.324 ; 199.25,6.827 ccw(c199.25,12.751) 205.174,12.746 cw(c214.25,12.75) 207.832,19.168 ; 199.25,8.998 ccw(c199.25,12.752) 203.004,12.749 ; 199.421,1.185 ccw(c199.25,12.75) 210.816,12.75 cw(c214.25,12.75) 211.822,15.178 213.047,16.403 ccw(c203.398,26.052) 217.043,26.052 217.04,62.055 ccw(c203.982,62.055) 213.215,71.288 204.611,79.893 ccw(c200.71,75.992) 200.71,81.508 196.25,81.508 196.25,81.5 ccw(c196.25,79) 193.75,79 cw(c192.75,79) 192.75,78 186.748,78 cw(c186.75,78.5) 186.25,78.5 ; 201.196,74.842 cw(c201.196,65.667) 207.683,72.155 211.329,68.509 cw(c204.875,62.055) 214.002,62.055 214.005,26.052 cw(c203.398,26.052) 210.898,18.551 ; 203.547,76.261 cw(c203.546,71.743) 206.741,74.938 212.249,69.429 cw(c204.875,62.055) 215.304,62.055 215.307,26.052 cw(c203.398,26.052) 211.819,17.631 ; 205.608,12.752 cw(c214.25,12.757) 208.139,18.867 ; 206.042,12.746 cw(c214.25,12.75) 208.446,18.554 ; 206.91,12.746 cw(c214.25,12.75) 209.06,17.94 ; 207.824,19.168 207.828,19.172 209.049,20.393 ; 208.131,18.861 208.139,18.868 209.356,20.086 ; 208.438,18.554 208.442,18.558 209.663,19.779 ; 208.745,18.247 208.749,18.251 209.97,19.472 ; 209.052,17.94 209.056,17.944 210.277,19.165 ; 209.072,12.75 cw(c214.242,12.75) 210.586,16.406 211.811,17.631 ; 209.361,17.636 209.363,17.637 210.587,18.861 ; 209.506,12.75 cw(c214.242,12.75) 210.893,16.099 212.118,17.324 ; 209.666,17.326 209.67,17.33 210.891,18.552 ; 209.975,17.022 209.976,17.024 211.2,18.247 ; 209.978,19.472 ccw(c203.398,26.052) 212.703,26.052 212.7,62.055 ccw(c204.877,62.055) 210.409,67.587 206.761,71.234 ccw(c201.196,65.669) 201.196,73.54 156.181,73.54 ccw(c156.181,63.176) 148.853,70.504 140.086,61.777 cw(c136.586,65.31) 136.586,60.337 133.16,60.337 ; 210.594,18.861 ccw(c203.401,26.054) 213.574,26.054 213.571,62.055 213.571,62.058 ; 211.208,18.247 ccw(c203.401,26.054) 214.442,26.054 214.439,62.055 214.439,62.058 ; v3(221.374,17.145) 221.374,9.126 221.502,8.998 ccw(c224.75,8.998) 224.75,5.75 ; 224.75,5.75 283.75,5.75 284.75,6.75 284.75,19.7 285.8,20.75 P802.1@286,20.75 ; R801.2@286,14.088 R801.2@286,14.263 ; 133.138,60.337 ccw(c133.16,63.333) 133.16,60.337 ; 133.138,60.337 133.16,60.337 ; 164.061,81.063 164.495,81.497 ; 164.495,81.497 164.55,81.552 164.592,81.552 164.537,81.497 183.25,81.497 cw(c183.25,78.497) 186.25,78.5
MAG2: P802.2 R801.1 | length 6
  Bottom Layer w0.254: P802.2@286,19.25 286,16.313 288.05,14.263 R801.1@288.05,14.088
NetC201_2: C201.2 U201.8 | length 3.4
  Bottom Layer w0.203: C201.2@261.96,66.26 261.96,66.46 262.68,67.18 U201.8@262.68,69.39
NetC202_1: C202.1 C203.1 U201.7 | length 3.9
  Bottom Layer w0.203: U201.7@263.18,69.39 263.18,68.19 263.38,67.99 C202.1@263.38,67.89 263.38,66.995 264.035,66.34 C203.1@264.51,66.34
NetD601_1: D601.1 PV601.1 | length 53.7
  Top Layer w3.81: PV601.1@25.5,21.689 PV601.1@25.5,43.5 25.5,43.8 PV601.1@25.5,65.611 25.5,75.4
  other v1: 24.337,75.732 26.65,75.732 25.5,76.571
NetD602_1: D602.1 PV603.1 | length 54
  Top Layer w3.81: PV603.1@135.1,21.689 135.1,43.8 PV603.1@135.1,65.911 ; PV603.1@135.1,65.611 135.1,75.4
  other v1: 133.937,75.724 136.25,75.724 135.1,76.563
NetD603_1: D603.1 PV605.1 | length 109.7
  Top Layer w1.27: 252.5,82.3 254.53,82.3 257.72,85.49 295.06,85.49 299.25,81.3 PV605.1@299.25,65.611
  Top Layer w3.81: PV605.1@299.25,21.889 299.25,44 PV605.1@299.25,66.111
  other v1: 253,80.7 252,81.508 253,82.3 252,83.25 253,83.75
NetOP301_2: OP301.2 R301.2 R302.1 | length 13.7
  Bottom Layer w0.254: R302.1@272.55,66.5 272.55,66.375 271.745,65.57 270.965,65.57 270.551,65.156 270.195,64.8 270.195,64 270.374,63.821 270.602,63.821 270.75,63.673 R301.2@270.75,63.648 270.75,62.83 271.38,62.2 276.567,62.2 277.468,63.101 277.468,63.968 OP301.2@277.47,63.97
NetOP301_3: OP301.3 R306.2 R307.1 | length 6
  Bottom Layer w0.254: R306.2@274.56,65.95 274.56,64.14 274.53,64.11 274.53,63.43 274.573,63.387 274.642,63.387 275.064,62.965 276.721,62.965 276.968,63.212 276.968,63.968 OP301.3@276.97,63.97
NetOP301_5: OP301.5 R304.2 R305.2 | length 2.5
  Bottom Layer w0.254: R304.2@276.425,68.9 276.47,68.855 OP301.5@276.47,66.46
NetPV601_2: PV601.2 PV602.1 | length 68.1
  Top Layer w3.81: PV601.2@49.122,43.5 PV602.1@73,43.5 ; PV602.1@72.75,21.389 72.75,43.5 PV602.1@72.75,65.611
NetPV603_2: PV603.2 PV604.1 | length 68.1
  Top Layer w3.81: PV603.2@158.722,43.5 PV604.1@182.6,43.5 ; PV604.1@182.6,21.389 PV604.1@182.6,43.5 ; PV604.1@182.6,65.611 PV604.1@182.6,43.5
NetPV605_2: PV605.2 PV606.1 | length 136
  Top Layer w3.81: PV606.1@239,65.611 PV606.1@239,43.5 PV606.1@239,21.389 247.589,12.8 315.458,12.8 322.142,19.484 322.364,19.484 322.872,19.992 PV605.2@322.872,21.389
NetR101_1: R101.1 U201.17 | length 4.2
  Bottom Layer w0.254: R101.1@258.961,74.56 260.44,74.56 260.725,74.845 261.931,74.845 262.18,74.596 U201.17@262.18,73.79
NetR301_1: R301.1 R303.3 | length 81.5
  Bottom Layer w0.254: R303.3@222.73,73.001 222.73,74.68 223.34,75.29 223.866,75.29 ; 223.866,75.29 224.414,75.29 ; 224.414,75.29 227.35,75.29 230.508,78.448 254.5,78.448 259.25,83.198 275.082,83.198 277.465,80.816 277.465,79.023 274.999,76.558 274.999,68.589 273.94,67.53 273.94,65.45 273.54,65.05 271.199,65.05 270.873,64.724 270.873,64.523 R301.1@270.75,64.4
NetR303_4: R303.4 R306.1 | length 71.4
  Bottom Layer w0.254: R303.4@225.27,78.999 225.389,78.88 254.321,78.88 259.071,83.63 275.261,83.63 277.896,80.995 277.896,78.844 275.431,76.379 275.431,68.171 274.573,67.313 274.573,66.715 R306.1@274.56,66.702
NetU201_12: U201.12
SPI_CLK: P801.6 U201.15 | length 48.4
  Bottom Layer w0.254: U201.15@260.48,72.59 260.478,72.588 259.451,72.588 257.887,71.025 257.887,65.268 263.464,59.691 286.191,59.691 287.932,61.432 287.932,65.318 286.75,66.5 P801.6@286,66.5
SPI_MISO: P801.7 U201.14 | length 44.6
  Bottom Layer w0.254: U201.14@260.48,72.09 260.478,72.088 259.561,72.088 258.319,70.846 258.319,65.446 263.643,60.123 285.965,60.123 287.432,61.59 287.432,64.618 287.05,65 P801.7@286,65
SPI_MOSI: P801.8 U201.13 | length 40.6
  Bottom Layer w0.254: U201.13@260.48,71.59 260.478,71.588 259.672,71.588 258.751,70.667 258.751,65.625 263.822,60.555 285.786,60.555 287,61.769 287,63.25 286.75,63.5 P801.8@286,63.5
SwitchUHF_Z: P801.3 S701.2 S701.3 | length 314.1
  Top Layer w0.254: S701.2@99.5,8 101.69,5.81 106.22,5.81 106.86,6.45 106.86,8.01 108.087,9.237 122.012,9.237 129.835,1.414 207.242,1.414 208.706,2.878 208.706,7.558 209.942,8.794 220.028,8.794 221.374,7.448 221.374,2.276 222.296,1.354 300.854,1.354 v1(302.75,3.25) ; S701.2@99.5,8.375 99.125,8.375 98.243,9.257 98.243,12.198 S701.3@99.5,13.455
  Bottom Layer w0.254: P801.3@285.75,71 P801.3@286,71 287.5,71 288.75,72.25 300.75,72.25 302.75,70.25 v1(302.75,3.25)
UHFKnifeReturn_Z: P801.1 R702.1 | length 293.7
  Top Layer w0.254: R702.1@119.55,7.9 121.6,7.9 128.95,0.55 207.6,0.55 209.57,2.52 209.57,7.2 210.3,7.93 219.67,7.93 220.51,7.09 220.51,1.89 221.91,0.49 305.865,0.49 306.999,1.624 v1(306.999,4.5)
  Bottom Layer w0.254: P801.1@285.75,74 287.932,74 288.818,73.114 303,73.114 306.999,69.114 v1(306.999,4.5)
V+: D601.2 D602.2 D603.2 R303.1 | length 226.9
  Bottom Layer w1.27: D601.2@26.3,85.05 26.69,84.66 103.411,84.66 109.229,78.842 121.442,78.842 126.85,84.25 D602.2@135.1,84.25 135.11,84.26 203.94,84.26 209.34,78.86 223.165,78.86 223.165,79.07 223.165,80.165 225.3,82.3 D603.2@243.95,82.3
V-: P803.1 P803.2 PV602.2 PV604.2 PV606.2 R305.1 | length 90.5
  Top Layer w0.254: 220.2,62.72 220.2,73.79 224.34,77.93 224.34,79.59 225.65,80.9 v1(227.37,80.9)
  Bottom Layer w0.254: v1(227.37,80.9) 228.4,80.9 229.508,79.792 254.012,79.792 258.714,84.494 275.619,84.494 278.76,81.353 278.76,78.486 276.295,76.021 276.295,73.005 278.921,70.379 279.004,70.379 R305.1@279.025,70.4
  other v1: 218.239,62.25 219.819,62.25 219,63 220.5,62.986
V_out: P803.3 P803.4 R303.2 R304.1 | length 91.6
  Top Layer w0.254: v1(224.14,74.63) 224.14,76.34 226.5,78.7 226.5,79.18 v1(227.33,80.01)
  Bottom Layer w0.254: R303.2@224.14,73.36 v1(224.14,74.63) ; v1(227.33,80.01) 228.34,80.01 228.99,79.36 254.191,79.36 258.892,84.062 275.44,84.062 278.328,81.174 278.328,78.665 275.863,76.2 275.863,70.4 R304.1@276.425,70.4
  Bottom Layer w1.27: 221.995,59.5 221.995,60.115 222.36,59.75 223.5,59.75 225.3,61.55 225.3,69.956 224.69,70.566 R303.2@224.69,73.36
VIN0: TP101.1 U201.18 U501_T1.B1 | length 23
  Top Layer w0.203: v1(259.97,80.02) 261.4,81.45 U501_T1.B1@274.66,81.45
  Bottom Layer w0.203: TP101.1@259.95,77.62 259.95,76.794 261.394,75.351 262,75.351 262.657,74.694 262.657,73.813 U201.18@262.68,73.79 ; TP101.1@259.97,77.62 v1(259.97,80.02)
VIN1: TP102.1 U201.19 U501_T2.B1 | length 169.6
  Top Layer w0.203: U501_T2.B1@165.74,10.59 165.74,11 165.9,11.16 166.27,11.16 169.263,8.167 208.117,8.167 209.582,9.632 217.752,9.632 234.635,26.515 234.635,52.263 234.625,52.273 234.625,54.125 229.295,59.455 229.295,72.585 v1(229.09,72.79)
  Bottom Layer w0.254: v1(229.09,72.79) 232.41,76.11 254.32,76.11 259.125,80.915 260.195,80.915 260.789,80.321 260.789,79.907 262.25,78.445 TP102.1@262.25,77.62 262.25,75.87 263.184,74.936 263.184,73.794 U201.19@263.18,73.79
VIN2: TP103.1 U201.20 U501_T3.B1 | length 226.7
  Top Layer w0.203: U501_T3.B1@56.07,82.5 56.071,82.501 56.071,82.645 56.346,82.92 v1(57.75,82.92) ; v1(229.05,78.21) 229.88,78.21 230.75,77.34 v1(231.92,77.34)
  Bottom Layer w0.203: v1(57.75,82.92) 58.144,83.314 102.766,83.314 108.584,77.496 122.141,77.496 127.035,82.39 203.785,82.39 208.657,77.519 208.716,77.459 214.879,77.459 214.882,77.461 215.218,77.461 215.221,77.459 223.481,77.459 223.54,77.4 224.666,76.274 226.366,76.274 228.302,78.21 v1(229.05,78.21) ; v1(231.92,77.34) 254.577,77.34 259.511,82.274 262.576,82.274 264.44,80.41 TP103.1@264.44,77.62
  Bottom Layer w0.254: U201.20@263.68,73.79 263.68,76.86 TP103.1@264.44,77.62
VIN3: C401_PD1.1 C402_PD1.2 D401_PD1.1 R401_PD1.2 TP104.1 U201.1 | length 12.6
  Top Layer w0.254: D401_PD1.1@266.97,80.15 267.31,79.81 v1(267.31,78.98)
  Bottom Layer w0.254: U201.1@264.88,72.59 265.501,72.59 266.239,73.328 TP104.1@268.218,73.328 ; v1(267.31,78.98) 267.397,78.893 267.397,78.523 268.08,77.84 C402_PD1.2@268.18,77.84 ; TP104.1@267.393,74.852 267.393,75.536 266.435,76.494 266.435,77.402 266.625,77.592 267.02,77.592 R401_PD1.2@267.02,77.616 267.132,77.728 268.068,77.728 C402_PD1.2@268.18,77.84 ; C401_PD1.1@269.335,77.84 C402_PD1.2@268.18,77.84
VIN4: C401_PD2.1 C402_PD2.2 D401_PD2.1 R401_PD2.2 TP105.1 U201.2 | length 211.7
  Top Layer w0.254: D401_PD2.1@158.39,8.55 v1(158.39,7.72) 159.606,7.72 163.546,11.66 166.44,11.66 169.527,8.573 206.303,8.573 212.89,15.16 cw(c215.05,13) 215.05,16.055 223.54,16.055 233.25,25.765 233.25,54.59 228.885,58.955 228.885,71.025 228.18,71.73 v1(228.18,75.18)
  Bottom Layer w0.203: R401_PD2.2@158.03,6.27 158.14,6.38 159.07,6.38 C402_PD2.2@159.18,6.49 C401_PD2.1@160.33,6.49
  Bottom Layer w0.254: v1(158.39,7.72) 158.477,7.633 158.477,7.263 C402_PD2.2@159.16,6.58 ; v1(228.18,75.18) 231.016,78.016 254.679,78.016 259.429,82.766 274.904,82.766 277.033,80.637 277.033,79.202 274.511,76.68 274.511,74.102 273.749,73.34 TP105.1@272.924,73.34 ; U201.2@264.88,72.09 266.445,72.09 267.139,72.784 272.924,72.784 TP105.1@272.98,72.84
VIN5: C401_PD3.1 C402_PD3.2 D401_PD3.1 R401_PD3.2 TP106.1 U201.3 | length 248
  Top Layer w0.254: D401_PD3.1@48.71,81.53 v1(48.71,80.7) v1@48.81,80.7 ; v1(227.18,78.18) 227.58,78.18 229.66,76.1 231.73,76.1 232.4,76.77 254.29,76.77 255.67,75.39 270.6,75.39 271.55,74.44 v1(271.55,71.82)
  Bottom Layer w0.203: R401_PD3.2@48.36,79.252 48.469,79.361 49.401,79.361 C402_PD3.2@49.51,79.47 C401_PD3.1@50.66,79.47 ; TP106.1@268.98,71.59 269.21,71.82 v1(271.55,71.82)
  Bottom Layer w0.254: C402_PD3.2@49.48,79.56 48.797,80.243 48.797,80.613 v1(48.71,80.7) 49.4,80.7 52.42,83.72 103.022,83.72 108.839,77.902 121.972,77.902 126.89,82.82 203.93,82.82 208.85,77.9 223.72,77.9 224.94,76.68 225.68,76.68 v1(227.18,78.18) ; U201.3@264.88,71.59 TP106.1@268.98,71.59
VIN6: OP301.6 OP301.7 TP107.1 U201.4 | length 15.7
  Top Layer w0.254: v1(273.98,68.91) 274.18,68.91 275.34,67.75 v1(277.2,67.75)
  Bottom Layer w0.254: U201.4@264.88,71.09 266.445,71.09 267.139,70.396 273.554,70.396 273.98,69.97 v1(273.98,68.91) ; v1(277.2,67.75) 277.21,67.74 277.21,66.38
VIN7: OP301.1 R302.2 TP108.1 U201.5 | length 22.9
  Bottom Layer w0.254: U201.5@264.88,70.59 266.078,70.59 266.816,69.852 268.218,69.852 TP108.1@268.98,69.09 269.806,69.09 270.965,67.931 270.965,66.585 R302.2@271.05,66.5 271.05,66.375 269.763,65.088 269.763,62.981 270.976,61.768 276.746,61.768 277.968,62.991 277.968,63.968 OP301.1@277.97,63.97
VKnife: P801.2 R702.2 | length 300.4
  Top Layer w0.254: R702.2@108.304,7.742 R702.2@108.518,7.956 ; R702.2@108.55,7.9 108.55,8.311 109.044,8.805 121.833,8.805 129.656,0.982 207.421,0.982 209.138,2.699 209.138,7.379 210.121,8.362 219.849,8.362 220.942,7.269 220.942,2.069 222.089,0.922 302.606,0.922 304.75,3.066 v1(304.75,4)
  Bottom Layer w0.254: P801.2@285.818,72.682 302.5,72.682 304.75,70.432 304.75,4.042 v1(304.75,4)
pads on no net: OP301.9 P701.1
copper on no net:
  other v2: 20,10 220,10 224,10 228,10 232,10 236,10 240,10 244,10 248,10 288,10 292,10 296,10 300,10 303.749,10 308,10 312,10 316,10 16,14 24,14 28,14 32,14 36,14 40,14 44,14 56.5,14 60,14 64,14 68,14 72,14 76,14 80,14 88,14 127.5,14 136,14 140,14 144,14 148,14 152,14 176,14 180,14 184,14 188,14 192,14 196,14 200,14 224,14 228,14 232,14 236,14 240,14 12,18 20,18 32,18 36,18 40,18 44,18 80,18 84,18 132,18 140,18 144,18 148,18 152,18 164,18 168,18 172,18 176,18 180,18 188,18 192,18 196,18 224,18 228,18 232,18 236,18 248,18 252,18 256,18 280,18 284,18 288,18 292,18 296,18 303.749,18 308,18 312,18 316,18 16,22 20,22 32,22 36,22 40,22 44,22 56,22 60,22 64,22 68,22 80,22 84,22 88,22 93.006,22 122.5,22 128,22 140,22 144,22 148,22 152,22 164,22 168,22 172,22 176,22 188,22 192,22 196,22 200,22 224,22 228,22 232,22 244,22 248,22 252,22 256,22 280,22 284,22 288,22 292,22 303.749,22 308,22 312,22 316,22 12,26 16,26 20,26 32,26 36,26 40,26 44,26 56,26 60,26 64,26 68,26 76,26 80,26 84,26 88,26 128,26 132,26 140,26 144,26 148,26 152,26 164,26 168,26 172,26 176,26 188,26 192,26 196,26 200,26 228,26 232,26 236,26 244,26 248,26 252,26 256,26 280,26 284,26 288,26 292,26 296,26 303.749,26 308,26 312,26 316,26 12,30 16,30 20,30 32,30 36,30 40,30 44,30 56,30 60,30 64,30 68,30 76,30 80,30 84,30 88,30 120,30 128,30 132,30 140,30 144,30 148,30 152,30 164,30 168,30 172,30 176,30 188,30 192,30 196,30 200,30 232,30 236,30 244,30 248,30 252,30 256,30 280,30 284,30 288,30 292,30 296,30 303.749,30 308,30 312,30 316,30 12,34 16,34 20,34 32,34 36,34 40,34 44,34 56,34 60,34 64,34 68,34 76,34 80,34 84,34 88,34 92,34 124,34 128,34 132,34 140,34 144,34 148,34 152,34 164,34 168,34 172,34 176,34 188,34 192,34 196,34 200,34 224,34 232,34 236,34 244,34 248,34 252,34 256,34 280,34 284,34 288,34 292,34 296,34 303.749,34 308,34 312,34 316,34 12,38 16,38 20,38 32,38 56,38 60,38 64,38 68,38 76,38 80,38 120,38 124,38 128,38 132,38 140,38 164,38 168,38 172,38 176,38 188,38 232,38 236,38 244,38 248,38 252,38 256,38 280,38 284,38 288,38 292,38 296,38 303.749,38 12,42 16,42 20,42 32,42 80,42 120,42 124,42 128,42 140,42 188,42 232,42 244,42 248,42 252,42 256,42 280,42 284,42 288,42 292,42 303.749,42 12,46 16,46 20,46 32,46 76,46 80,46 120,46 124,46 128,46 132,46 140,46 188,46 232,46 236,46 244,46 248,46 252,46 256,46 280,46 284,46 288,46 292,46 296,46 303.749,46 303.749,50 12,50 16,50 20,50 32,50 36,50 40,50 44,50 56,50 60,50 64,50 68,50 76,50 80,50 84,50 88,50 92,50 120,50 124,50 128,50 132,50 140,50 144,50 148,50 152,50 164,50 168,50 172,50 176,50 188,50 192,50 196,50 200,50 224,50 228,50 232,50 236,50 244,50 248,50 252,50 256,50 280,50 284,50 288,50 292,50 296,50 308,50 312,50 316,50 12,54 16,54 20,54 32,54 36,54 40,54 44,54 56,54 60,54 64,54 68,54 76,54 80,54 84,54 88,54 92,54 120,54 124,54 128,54 132,54 144,54 148,54 152,54 164,54 168,54 172,54 176,54 188,54 192,54 196,54 200,54 228,54 232,54 236,54 244,54 248,54 252,54 256,54 280,54 284,54 288,54 292,54 296,54 303.749,54 308,54 312,54 316,54 288,57.5 292,57.5 12,58 16,58 20,58 32,58 36,58 40,58 44,58 56,58 60,58 64,58 68,58 76,58 80,58 84,58 88,58 92,58 120,58 124,58 128,58 148,58 152,58 164,58 168,58 172,58 176,58 188,58 192,58 196,58 200,58 232,58 236,58 244,58 248,58 252,58 256,58 280,58 284,58 296,58 303.749,58 308,58 312,58 316,58 115.953,58.201 228.03,58.25 16,62 20,62 32,62 36,62 40,62 44,62 56,62 60,62 64,62 68,62 76,62 80,62 84,62 88,62 92,62 144,62 152,62 164,62 168,62 172,62 176,62 188,62 192,62 196,62 200,62 228,62 232,62 236,62 244,62 248,62 252,62 256,62 284,62 292,62 303.749,62 308,62 312,62 316,62 12,66 32,66 36,66 40,66 44,66 56,66 60,66 64,66 68,66 80,66 84,66 88,66 92,66 140,66 148,66 164,66 168,66 172,66 176,66 188,66 192,66 196,66 200,66 224,66 232,66 244,66 248,66 252,66 256,66 292,66 303.749,66 308,66 312,66 316,66 115.808,66.167 119.808,66.167 123.808,66.167 127,66.167 8,70 144,70 232,70 236,70 240,70 244,70 248,70 252,70 256,70 284,70 292,70 296,70 303.749,70 308,70 312,70 316,70 12,74 68,74 72,74 76,74 80,74 84,74 88,74 92,74 120,74 124,74 128,74 132,74 148,74 236,74 240,74 244,74 248,74 252,74 284,74 292,74 296,74 304,74 308,74 316,74 32,74.8 36,74.8 40,74.8 172,76 176,76 180,76 196,77.132 200,77.132 128,77.5 152,77.5 15.6,77.65 296,78 304,78 308,78 312,78 316,78

## Polygon pours and split planes (outlines as drawn)
GND on Top Layer "Top Layer-GND 1" (solid, remove dead copper, pour order 12): 328,0 328,88 0,88 0,0
V- on Top Layer "Top Layer-GND" (solid, remove dead copper, pour order 2): 121.15,77.58 105.97,77.58 98.57,70.18 94.1,70.18 94.1,92.8 217.9,92.8 217.9,69.18 203.72,69.18 203.72,79.75 199.98,83.49 127.06,83.49
GND on Bottom Layer "Bottom Layer-GND" (solid, remove dead copper, pour order 8): 328,0 328,88 0,88 0,0

## Keep-outs
Keep-Out Layer:
  circle w0.254: c269.35,43.5 r8.132
  lines w0.254: 143.35,38 143.35,49 ; 143.35,38 155.55,38 ; 143.35,38 143.35,49 ; 143.35,38 155.55,38 ; 143.35,49 155.55,49 ; 143.35,49 155.55,49 ; 155.55,38 155.55,49 ; 155.55,38 155.55,49 ; 0,7.009 8.8,6.913 8.8,0 109.4,0 109.4,7 118.7,7 118.7,0 210.4,0 210.4,7 219.7,7 219.7,0 318.7,0 318.7,7 327.5,7 327.5,80 318.7,80 318.7,87 219.7,87 219.7,80 210.4,80 210.4,87 118.7,87 118.7,80 109.4,80 109.4,87 8.8,87 8.8,80.083 0,79.988 0,7.009 ; 33.75,37.75 33.75,48.75 45.9,48.75 45.9,37.75 33.75,37.75 ; 81.25,38 93.4,38 93.4,49 81.25,49 81.25,38 ; 190.85,38 190.85,49 203.05,49 203.05,38 190.85,38 ; 218.55,38 230.75,38 230.75,49 218.55,49 218.55,38 ; 307.5,38 307.5,49 319.7,49 319.7,38 307.5,38

## Other copper
Top Layer:
  region net NetD603_1: 253.4,80.2 253.4,84.3 251.45,84.3 251.45,80.2
  rectangle net V-: 216.9,61.7 221,63.5
  region net V-: 99.15,84.19 94.1,84.19 94.1,17.45 99.15,17.45
  region net V-: 217.906,69.55 203.7,69.55 203.7,17.45 217.906,17.45
  region net NetPV605_2: 325.4,69.55 320.35,69.55 320.35,17.45 325.4,17.45
  region net NetPV603_2: 161.25,69.55 156.2,69.55 156.2,17.45 161.25,17.45
  region net NetPV601_2: 51.65,69.55 46.6,69.55 46.6,17.45 51.65,17.45
Bottom Layer:
  rectangle net VIN6: 276.85,65.77 277.59,67.16
  rectangle net NetOP301_5: 276.39,68.4 279.28,69.4
  region net NetD603_1: 253.4,80.2 253.4,84.3 249.3,84.3 249.3,80.2
  rectangle net V_out: 221.15,58.25 222.88,61
  rectangle net V-: 217.75,61.37 222.88,63.57
  rectangle net NetD602_1: 133,74.8 137.1,78.9
  rectangle net NetD601_1: 23.4,74.8 27.5,78.9

## Silkscreen, mask and mechanical layers (free items; w line width, h text height)
Top Overlay:
  drawing of 4351 lines, arcs and shapes, not listed
  text "STARBOARD" at 157,84.8 h2
  text "HYPERION: ZENITH" at 287.061,84.388 h3
  text "'.ModifiedDate' V1.04 2699" at 286.888,82.376 h2
  text "Nicholas Sorensen, Erik Halliwell, and Shirley Wang" at 286.963,78.532 h2
  text "ANTIRAM" at 327.1,39.5 h2 r90
  text "RAM" at 2.2,37.6 h2 r90
  text "PORT" at 158.5,0.5 h2
Bottom Overlay:
  lines w0.254: 271.5,75.75 271.995,75.255 ; 274.5,81 273.495,81 271.995,79.5 271.995,75.25 ; 271.995,75.25 271.995,75.255 ; 271.995,75.25 271.995,75.255 ; 271.995,75.25 272.5,75.755 271.995,75.25 ; 274.5,80.02 274.5,86.5 284.5,86.5 284.5,80.02 274.5,80.02
  text "STARBOARD" at 167,84.735 h2
  text "Test Points: / TP101-VIN0 / TP102-VIN1 / TP103-VIN2 / TP104-VIN3 / TP105-VIN4 / TP106-VIN5 / TP107-VIN6 / TP108-VIN7" at 239.344,76.318 h0.7
  text "UHFKnifeReturn_Z" at 303.8,74.7 h0.7
  text "VKnife" at 296.9,72.5 h0.7
  text "SwitchUHF_Z" at 300.4,70.9 h0.7
  text "GND" at 295.1,68.91 h0.7
  text "3V3" at 295.1,67.393 h0.7
  text "SPI_CLK" at 307.3,66.7 h0.7
  text "SPI_MISO" at 307.8,64.7 h0.7
  text "SPI_MOSI" at 307.7,62.9 h0.7
  text "ADC_SPI_nCS_Z" at 301.9,61.5 h0.7
  text "RAM" at 2.2,50.4 h2 r90
  text "ANTIRAM" at 326.9,48 h2 r90
  text "PORT" at 166.5,0.5 h2
Mechanical 1:
  circle w0.254: c269.35,43.5 r8.132
  lines w0.254: 143.35,38 155.55,38 ; 143.35,38 143.35,49 ; 143.35,38 155.55,38 ; 143.35,38 143.35,49 ; 143.35,49 155.55,49 ; 143.35,49 155.55,49 ; 155.55,38 155.55,49 ; 155.55,38 155.55,49 ; 0,7.009 0,79.988 8.8,80.083 8.8,87 109.4,87 109.4,80 118.7,80 118.7,87 210.4,87 210.4,80 219.7,80 219.7,87 318.7,87 318.7,80 327.5,80 327.5,7 318.7,7 318.7,0 219.7,0 219.7,7 210.4,7 210.4,0 118.7,0 118.7,7 109.4,7 109.4,0 8.8,0 8.8,6.913 0,7.009 ; 33.75,37.75 33.75,48.75 45.9,48.75 45.9,37.75 33.75,37.75 ; 81.25,38 81.25,49 93.4,49 93.4,38 81.25,38 ; 190.85,38 203.05,38 203.05,49 190.85,49 190.85,38 ; 218.55,38 218.55,49 230.75,49 230.75,38 218.55,38 ; 307.5,38 319.7,38 319.7,49 307.5,49 307.5,38

## Text inside footprints (layer, text, board x,y; h text height)
PV601: Top Overlay "-" at 49.5,60.645 h0.7 r270; Top Overlay "-" at 49.5,39.944 h0.7 r270; Top Overlay "-" at 49.528,26.406 h0.7 r270; Top Overlay "+" at 24.865,61.28 h0.7 r270; Top Overlay "+" at 24.865,39.055 h0.7 r270; Top Overlay "+" at 24.865,16.83 h0.7 r270
PV602: Top Overlay "+" at 72.365,16.83 h0.7 r270; Top Overlay "+" at 72.365,39.055 h0.7 r270; Top Overlay "+" at 72.365,61.28 h0.7 r270; Top Overlay "-" at 97.028,26.406 h0.7 r270; Top Overlay "-" at 97,39.944 h0.7 r270; Top Overlay "-" at 97,60.645 h0.7 r270
PV603: Top Overlay "-" at 159.1,60.645 h0.7 r270; Top Overlay "-" at 159.1,39.944 h0.7 r270; Top Overlay "-" at 159.128,26.406 h0.7 r270; Top Overlay "+" at 134.465,61.28 h0.7 r270; Top Overlay "+" at 134.465,39.055 h0.7 r270; Top Overlay "+" at 134.465,16.83 h0.7 r270
PV604: Top Overlay "+" at 181.965,16.83 h0.7 r270; Top Overlay "+" at 181.965,39.055 h0.7 r270; Top Overlay "+" at 181.965,61.28 h0.7 r270; Top Overlay "-" at 206.628,26.406 h0.7 r270; Top Overlay "-" at 206.6,39.944 h0.7 r270; Top Overlay "-" at 206.6,60.645 h0.7 r270
PV605: Top Overlay "-" at 323.25,60.645 h0.7 r270; Top Overlay "-" at 323.25,39.944 h0.7 r270; Top Overlay "-" at 323.278,26.406 h0.7 r270; Top Overlay "+" at 298.615,61.28 h0.7 r270; Top Overlay "+" at 298.615,39.055 h0.7 r270; Top Overlay "+" at 298.615,16.83 h0.7 r270
PV606: Top Overlay "+" at 239.635,70.17 h0.7 r90; Top Overlay "+" at 239.635,47.945 h0.7 r90; Top Overlay "+" at 239.635,25.72 h0.7 r90; Top Overlay "-" at 214.972,60.594 h0.7 r90; Top Overlay "-" at 215,47.056 h0.7 r90; Top Overlay "-" at 215,26.355 h0.7 r90